# Altium PCB Copy of PCB1.PcbDoc
Units mm, origin at the board's own origin, x right, y up, seen from the top; angles counter-clockwise.
Board outline 88.75 x 93.25 mm, 2 copper layers (Top Layer, Bottom Layer); 31 components, 32 nets, 137 pads, 4 vias.
Unrouted connection lines stored in the file: 64.
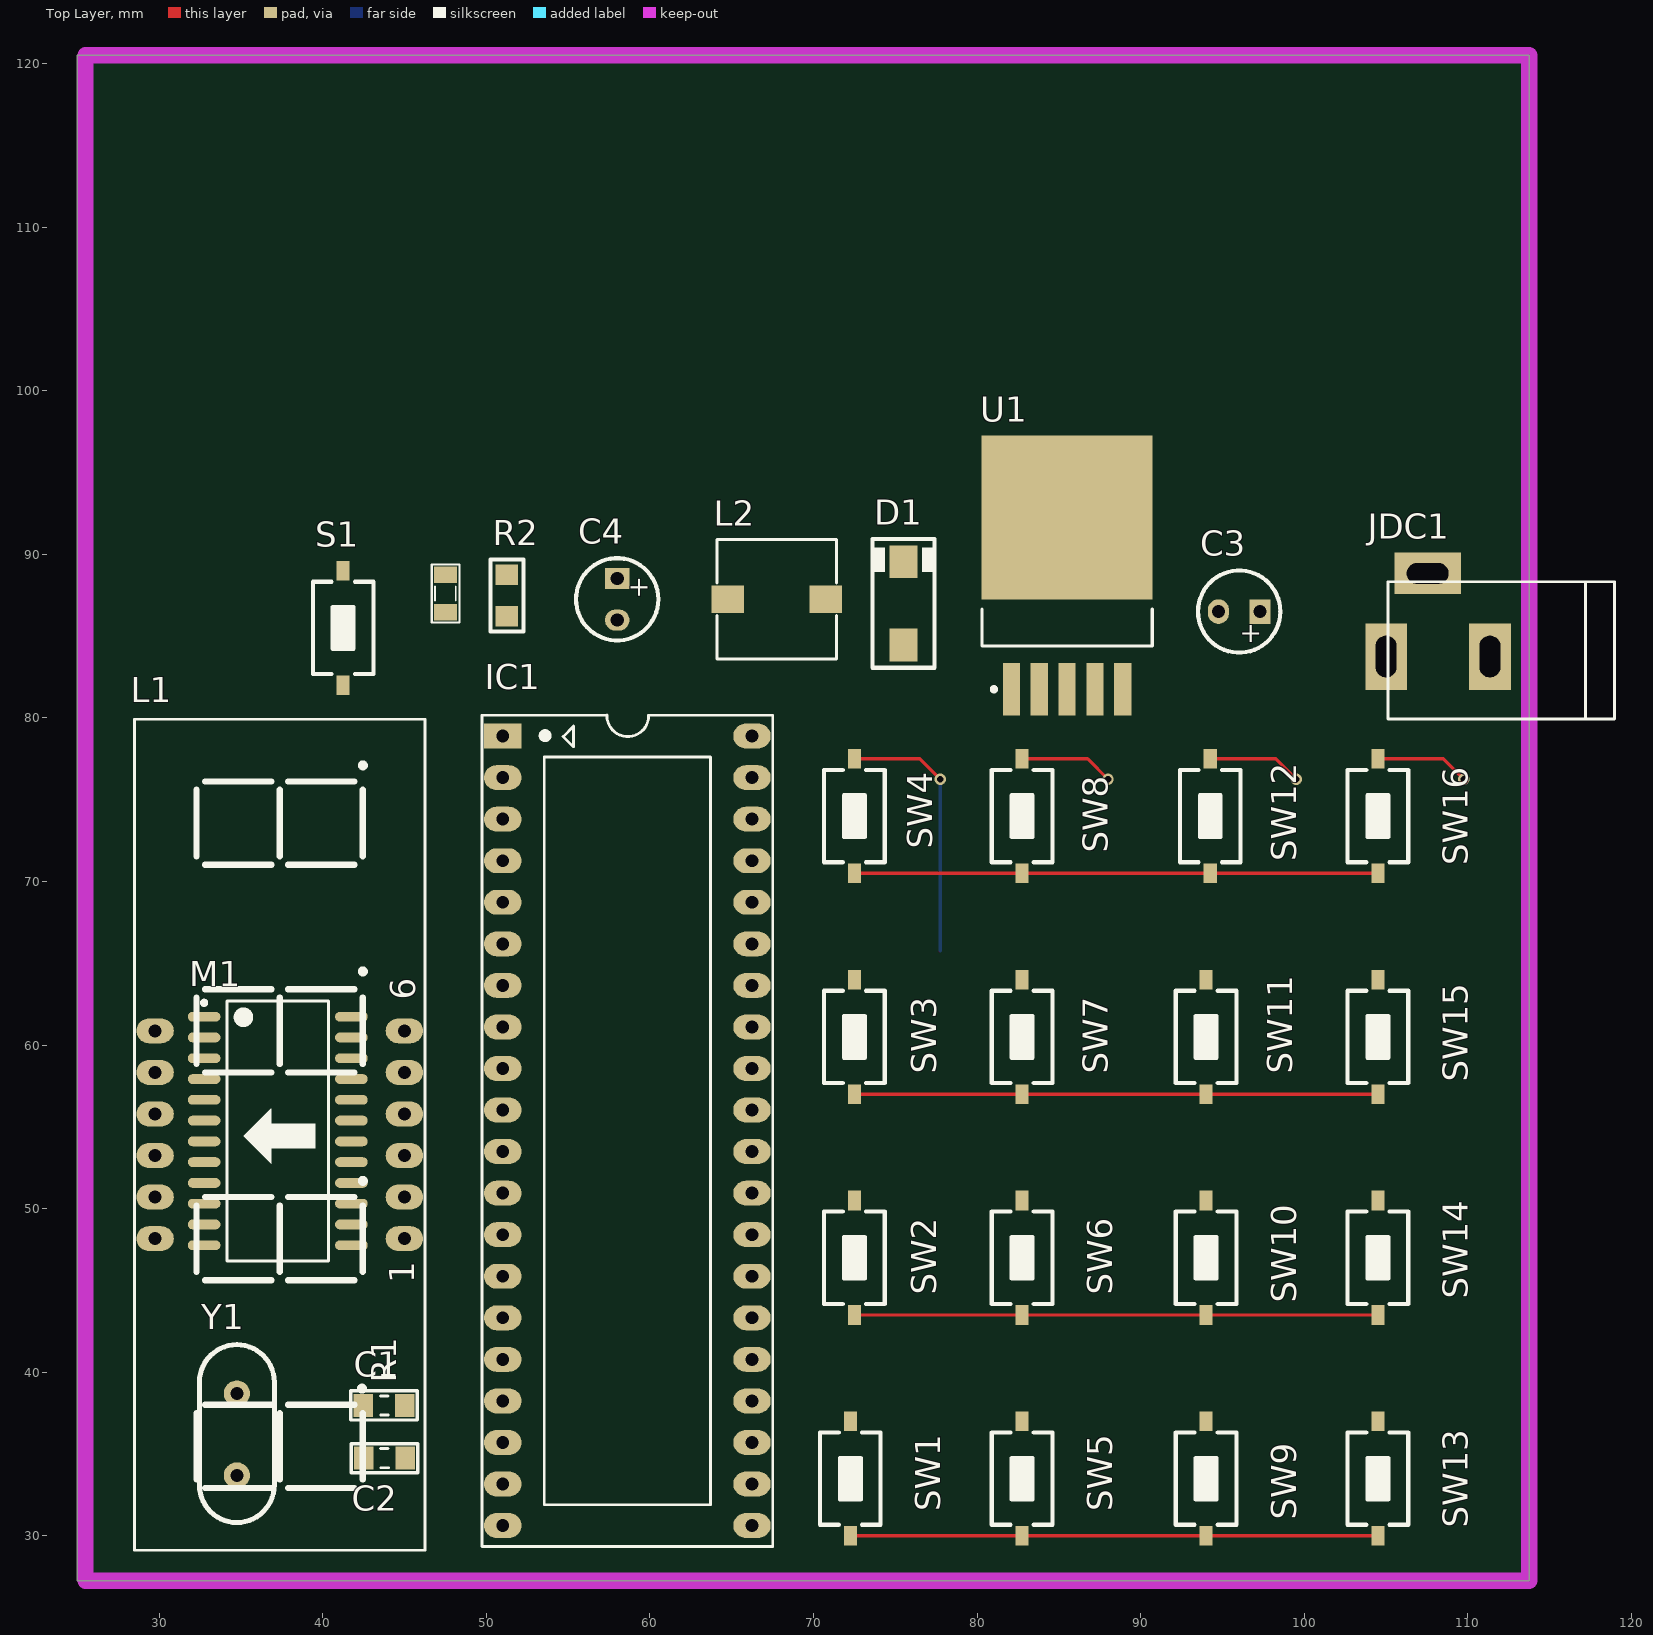
[diagram p0: Top Layer view]
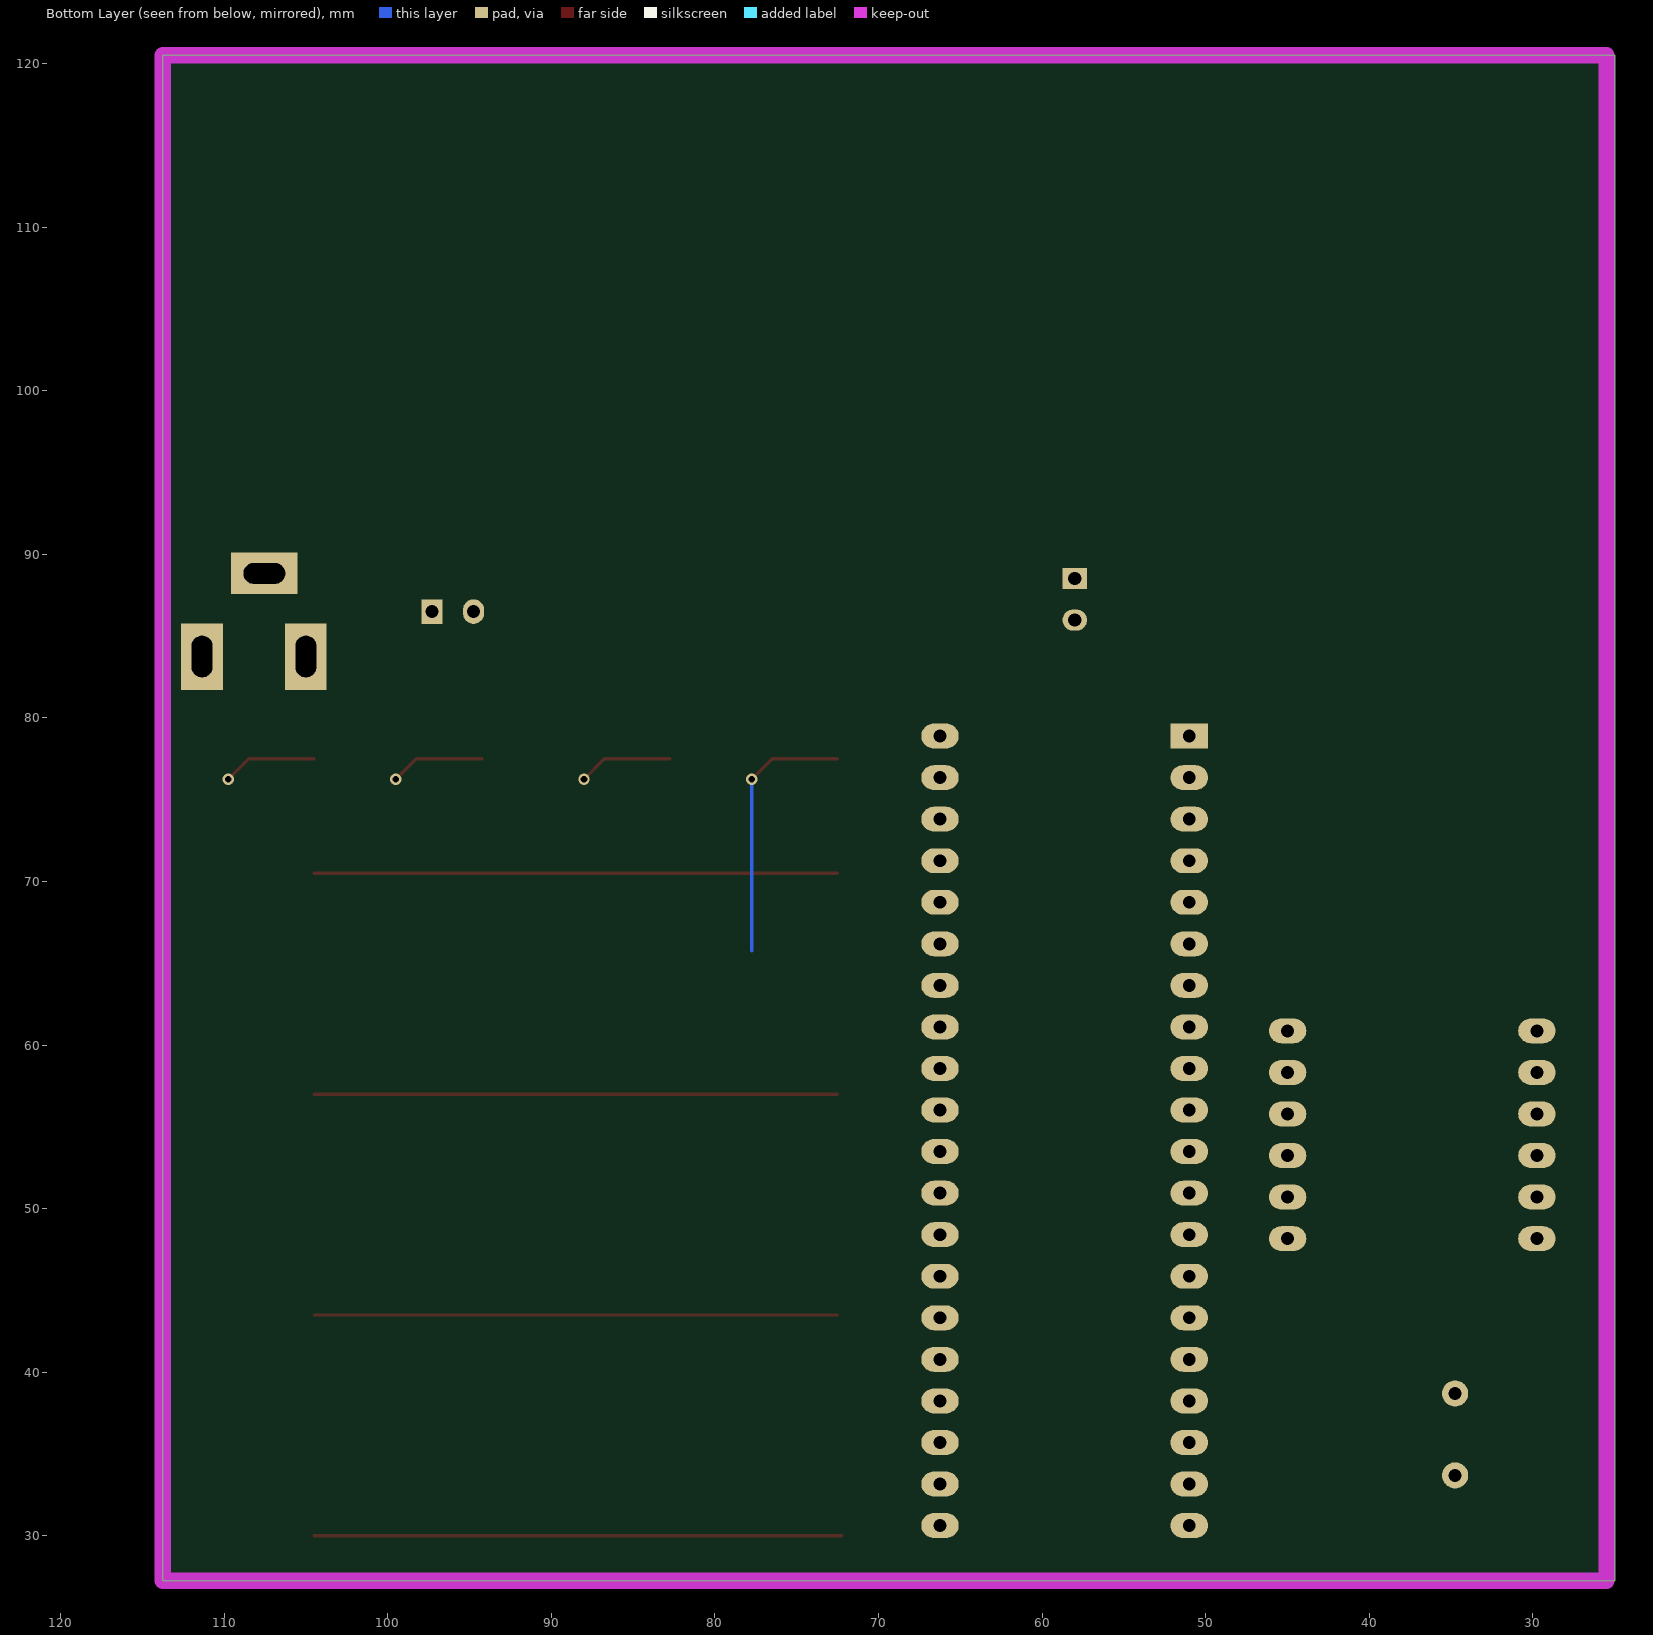
[diagram p1: Bottom Layer view, seen from below]

## Layer stack, top to bottom
Top Solder: solder mask 0.0102, Solder Resist, Dk 3.5
Top Layer: signal copper 0.0356
Dielectric 1: dielectric 0.32, FR-4, Dk 4.8
Bottom Layer: signal copper 0.0356
Bottom Solder: solder mask 0.0102, Solder Resist, Dk 3.5

## Board outline
25,27.25 25,120.5 113.75,120.5 113.75,27.25

## Design rules (kind name [scope] priority, off if disabled: settings)
Clearance [All] p1: gap=0.2 ignorepadtopadclearanceinfootprint=FALSE
PolygonConnect [All] p1: connectstyle=Relief reliefconductorwidth=0.254 reliefentries=4 polygonreliefangle="90 Angle" airgapwidth=0.254
RoutingVias RoutingVias_power [InNetClass('Power_class')] p1: holewidth=0.7 width=1.1 viastyle="Through Hole" minholewidth=0.7 minwidth=1.1 maxholewidth=0.7 maxwidth=1.1
RoutingVias RoutingVias_signal [All] p2: holewidth=0.4 width=0.7 viastyle="Through Hole" minholewidth=0.4 minwidth=0.7 maxholewidth=0.4 maxwidth=0.7
SolderMaskExpansion [All] p1: expansion=0.102
Width Width_power [InNetClass('Power_class')] p1: maxlimit=2 minlimit=0.5 preferedwidth=1
Width Width_signal [All] p2: maxlimit=0.2 minlimit=0.2 preferedwidth=0.2
30 further rules are at their usual default settings.

## Classes and differential pairs
net class Power_class: +5 GND NetC3_1 NetD1_2
component class Designator: SW1 SW2 SW3 SW4 SW5 SW6 SW7 SW8 SW9 SW10 SW11 SW12 SW13 SW14 SW15 SW16
component class [05]-POWER: C3 C4 D1 JDC1 L2 U1
component class [03]-LED7SEG: L1 M1 R2
component class [02]-MCU: C1 C2 IC1 R1 S1 Y1

## Components (designator, comment, footprint, x,y, rotation, side; value= is the part's Value field where it differs from the comment)
C1 "22pF" CAP_0805 43.75,38 r0 top value=33p
C2 "22pF" CAP_0805 43.77,34.775 r0 top value=33p
C3 "470uF" C5mm 96.02,86.5 r180 top
C4 "220uF" C5mm 58,87.25 r270 top
D1 "1N5822" SMA 75.5,87 r90 top value="Diode c?m 1N5408"
IC1 "AT89C52" DIP40/W0.6 51,78.89 r270 top
JDC1 "Jac DC" DC-IN 108.175,86.29 r180 top
L1 "Led 7 Seg 4 digit - Anode" 7SEGQ 44.99,48.17 r90 top
L2 "150mH" L-SMD-M-7.3x4.5 67.75,87.25 r270 top value="150 mH"
M1 "MAX7219ENG" SO24_L 37.25,54.75 r0 top
R1 "1k" RES-SMD-0805 47.5,87.607 r90 top value="R1/4W - 1K"
R2 "10k" RES_SMD_0805 51.25,87.48 r90 top value="R1/4W - 1K"
S1 "SW-SMD" SW-SMD 41.25,85.5 r90 top
SW1 "SW" SW-SMD 72.25,33.5 r90 top value="SW chip 2 pin"
SW2 "SW" SW-SMD 72.5,47 r90 top value="SW chip 2 pin"
SW3 "SW" SW-SMD 72.5,60.5 r90 top value="SW chip 2 pin"
SW4 "SW" SW-SMD 72.5,74 r90 top value="SW chip 2 pin"
SW5 "SW" SW-SMD 82.75,33.5 r90 top value="SW chip 2 pin"
SW6 "SW" SW-SMD 82.75,47 r90 top value="SW chip 2 pin"
SW7 "SW" SW-SMD 82.75,60.5 r90 top value="SW chip 2 pin"
SW8 "SW" SW-SMD 82.75,74 r90 top value="SW chip 2 pin"
SW9 "SW" SW-SMD 94,33.5 r90 top value="SW chip 2 pin"
SW10 "SW" SW-SMD 94,47 r90 top value="SW chip 2 pin"
SW11 "SW" SW-SMD 94,60.5 r90 top value="SW chip 2 pin"
SW12 "SW" SW-SMD 94.25,74 r90 top value="SW chip 2 pin"
SW13 "SW" SW-SMD 104.5,33.5 r90 top value="SW chip 2 pin"
SW14 "SW" SW-SMD 104.5,47 r90 top value="SW chip 2 pin"
SW15 "SW" SW-SMD 104.5,60.5 r90 top value="SW chip 2 pin"
SW16 "SW" SW-SMD 104.5,74 r90 top value="SW chip 2 pin"
U1 "LM2976" TO-263 85.5,87.75 r90 top
Y1 "20MHz" XTAL 34.75,36.25 r90 top

## Footprints (in the part's own frame and the unit in brackets; to place one, negate y for a bottom-side part, rotate by r counter-clockwise, add the part's x,y. Pads: shape width x height; smd on the part's side, far side on the other; paste and mask are expansions set on the pad)
7SEGQ [mil] "DIP 12 Leads; Body 48 x 20 mm; Pitch 0.5 mm"
  oval 60x90 hole 31: 1(0,0) 2(100,0) 3(200,0) 4(300,0) 5(400,0) 6(500,0) 7(500,600) 8(400,600) 9(300,600) 10(200,600) 11(100,600) 12(0,600)
  silkscreen extent -750,-50 1250,650, body extent -720,-80 1260,668, height 565
C5mm [mm]
  rect 1.3x1.5 hole 0.8: 1(-1.27,0)
  oval 1.3x1.5 hole 0.8: 2(1.27,0)
  silkscreen extent -2.51,-2.51 2.51,2.51, body extent -2.5,-2.5 2.49,2.5, height 11.01
CAP_0805 [mm]
  rect 1.2x1.4 smd: 1(-1.27,-0.025) 2(1.27,-0.025)
  silkscreen extent -2.03,-0.91 2.03,0.86, body extent -1.01,-0.66 1.01,0.61, height 0.61
DC-IN [mil] "Jac DC input"
  rect 100x160 hole 50 slot 100 at 90 deg: 1(125,100) 2(-125,100)
  rect 160x100 hole 50 slot 100 at 0 deg: 3(25,-100)
  silkscreen extent -425,-80 120,250, body extent -410,-105 134,269, height 434
DIP40/W0.6 [mil] "40 PIN, W 600mil, Pin to pin 100mil"
  rect 60x90 hole 31: 1(0,0)
  oval 60x90 hole 31: 2(100,0) 3(200,0) 4(300,0) 5(400,0) 6(500,0) 7(600,0) 8(700,0) 9(800,0) 10(900,0) 11(1000,0) 12(1100,0) 13(1200,0) 14(1300,0) 15(1400,0) 16(1500,0) 17(1600,0) 18(1700,0) 19(1800,0) 20(1900,0) 21(1900,600) 22(1800,600) 23(1700,600) 24(1600,600) 25(1500,600) 26(1400,600) 27(1300,600) 28(1200,600) 29(1100,600) 30(1000,600) 31(900,600) 32(800,600) 33(700,600) 34(600,600) 35(500,600) 36(400,600) 37(300,600) 38(200,600) 39(100,600) 40(0,600)
  silkscreen extent -50,-50 1950,650, body extent -82,-10 1982,600, height 224
L-SMD-M-7.3x4.5 [mm] "WE-PDA SMD Shielded Power Inductor, 7345"
  rect 1.7x2 smd: 1(0,3) 2(0,-3)
  silkscreen extent -3.65,-3.65 3.65,3.65, body extent -3.65,-3.65 3.65,3.65, height 4.05
RES-SMD-0805 [mil]
  rect 39.37x55 smd: 1(-45,0) 2(45,0)
  silkscreen extent -70,-34 70,33, body extent -39,-25 39,25, height 31
RES_SMD_0805 [mil]
  rect 50x55 smd: 1(-50,0) 2(50,0)
  silkscreen extent -87,-40 87,39, body extent -45,-27 45,27, height 30
SMA [mm]
  rect 2x1.7 smd: 1(-2.544,0) 2(2.544,0)
  silkscreen extent -3.94,-1.9 3.94,1.91, body extent -2.87,-1.4 2.87,1.4, height 2.29
SO24_L [mm] "SOIC, 24-Leads, Body 15.4x7.5mm, Pitch 1.27mm, IPC High Density"
  oval 2x0.6 smd: 1(-4.5,6.985) 2(-4.5,5.715) 3(-4.5,4.445) 4(-4.5,3.175) 5(-4.5,1.905) 6(-4.5,0.635) 7(-4.5,-0.635) 8(-4.5,-1.905) 9(-4.5,-3.175) 10(-4.5,-4.445) 11(-4.5,-5.715) 12(-4.5,-6.985) 13(4.5,-6.985) 14(4.5,-5.715) 15(4.5,-4.445) 16(4.5,-3.175) 17(4.5,-1.905) 18(4.5,-0.635) 19(4.5,0.635) 20(4.5,1.905) 21(4.5,3.175) 22(4.5,4.445) 23(4.5,5.715) 24(4.5,6.985)
  silkscreen extent -4.62,-7.95 3.1,7.96, body extent -3.8,-7.8 3.8,7.8, height 2.65
SW-SMD [mm] "Switch SMD type"
  rect 1.2x0.8 smd: 1(-3.5,0) 2(3.5,0)
  silkscreen extent -2.82,-1.85 2.82,1.85, body extent -3.05,-1.85 3.05,1.85, height 2.5
TO-263 [mm]
  rect 3.2x1.05 smd: 1(-6,3.4) 2(-6,1.7) 3(-6,0) 4(-6,-1.7) 5(-6,-3.4)
  rect 10x10.45 smd: 6(4.5,0)
  silkscreen extent -6.12,-5.2 -1.1,5.2, body extent -6.58,-5.2 7.57,5.2, height 4.65
XTAL [mm]
  round 1.6 hole 0.8: 1(-2.552,0.001) 2(2.448,0.001)
  silkscreen extent -5.44,-2.29 5.44,2.29, body extent -5.55,-2.32 5.62,2.35, height 3.63

## Part data
C1 C2: library part CapSMD, "Capacitor", LatestRevisionDate=17-Jul-2002, LatestRevisionNote="Re-released for DXP Platform.", PackageReference=RAD-0.3, Published=8-Jun-2000, Publisher="Altium Limited"
C3 C4: library part "Cap Pol", "Polarized Capacitor (Axial)", LatestRevisionDate=17-Jul-2002, LatestRevisionNote="Re-released for DXP Platform.", PackageReference=POLAR0.8, Published=8-Jun-2000, Publisher="Altium Limited"
D1: "Schottky Rectifiers"
IC1: "Atmel AT89C52, 8k Byte Flash Memory , 40 Pin"
JDC1: library part DCIN, "Jac DC input"
L1: library part LED7SEG-4DIGIT-A
L2: library part Inductor, "Inductor"
M1: "Serially Interfaced, 8-Digit LED Display Driver", Code_JEDEC=MS-001-AF, ComponentLink1Description="Manufacturer Link", ComponentLink1URL=http://www.maxim-ic.com/, ComponentLink2Description=Datasheet, ComponentLink2URL=http://pdfserv.maxim-ic.com/en/ds/MAX7219-MAX7221.pdf, DatasheetVersion=Jul-1997, LatestRevisionDate=29-May-2009, LatestRevisionNote="Component Body Added.", PackageDescription="DIP, 24-Pin, Row Spacing 7.62 mm, Pitch 2.54 mm", PackageReference=NG24A, PackageVersion=1997, Published=16-Jan-2001, Publisher="Altium Limited"
R1 R2: library part "Resistor - DIP", "Resistor - DIP"
S1: "Switch", LatestRevisionDate=17-Jul-2002, LatestRevisionNote="Re-released for DXP Platform.", PackageReference=SPST-2, Published=24-Mar-1999, Publisher="Altium Limited"
SW1 SW2 SW3 SW4 SW5 SW6 SW7 SW8 SW9 SW10 SW11 SW12 SW13 SW14 SW15 SW16: library part SW2, "Switch button 2 pin"
U1: library part LM2596, Max Input Voltage="12 V", Max Output Current="3 (6.0 peak) A", Max Output Voltage=mV, Temperature Range="-40 to +125 degC", Category=IC-Power, Min Input Voltage=mV, Min Output Voltage=mV, Mounting Technology="Surface Mount", Status=Unreleased, Supply Voltage=mV
Y1: library part XTAL, "Crystal Oscillator", LatestRevisionDate=17-Jul-2002, LatestRevisionNote="Re-released for DXP Platform.", PackageReference=R38, Published=8-Jun-2000, Publisher="Altium Limited"

## Via types
v1: diameter 0.7, hole 0.4, Top Layer to Bottom Layer, 4 vias

## Nets (pads, with @x,y where several pads share a name; then routed paths per layer and width w, separated by ;. In a path a pad name is that pad's centre, name@x,y a point inside that pad or via, vN(x,y) a via of type N, cw(c..) or ccw(c..) an arc to the next point about the centre after c; other vN are vias at no path point)
+5: C4.1 IC1.31 IC1.40 L1.7 L2.2 M1.19 R2.2 S1.1 U1.4
D0: M1.2
D1: L1.11 M1.11
D2: L1.10 M1.6
D3: L1.6 M1.7
GND: C1.1 C2.1 C3.2 C4.2 D1.1 JDC1.2 JDC1.3 L1.8 M1.4 M1.9 R1.1 U1.3 U1.5
NetC1_2: C1.2 IC1.18 Y1.2
NetC2_2: C2.2 IC1.19 Y1.1
NetC3_1: C3.1 JDC1.1 U1.1
NetD1_2: D1.2 L2.1 U1.2
NetIC1_1: IC1.1 SW1.1 SW5.1 SW9.1 SW13.1 | length 32.2
  Top Layer w0.2: SW1.1 SW5.1 SW9.1 SW13.1
NetIC1_2: IC1.2 SW2.1 SW6.1 SW10.1 SW14.1 | length 32
  Top Layer w0.2: SW2.1 SW6.1 SW10.1 SW14.1
NetIC1_3: IC1.3 SW3.1 SW7.1 SW11.1 SW15.1 | length 32
  Top Layer w0.2: SW3.1 SW7.1 SW11.1 SW15.1
NetIC1_4: IC1.4 SW4.1 SW8.1 SW12.1 SW16.1 | length 32
  Top Layer w0.2: SW4.1 SW8.1 SW12.1 SW16.1
NetIC1_5: IC1.5 SW1.2 SW2.2 SW3.2 SW4.2 | length 16.3
  Top Layer w0.2: SW4.2 76.5,77.5 v1(77.75,76.25)
  Bottom Layer w0.2: 77.75,65.75 v1(77.75,76.25)
NetIC1_6: IC1.6 SW5.2 SW6.2 SW7.2 SW8.2 | length 5.8
  Top Layer w0.2: SW8.2 86.75,77.5 v1(88,76.25)
NetIC1_7: IC1.7 SW9.2 SW10.2 SW11.2 SW12.2 | length 5.8
  Top Layer w0.2: SW12.2 98.25,77.5 v1(99.5,76.25)
NetIC1_8: IC1.8 SW13.2 SW14.2 SW15.2 SW16.2 | length 5.8
  Top Layer w0.2: SW16.2 108.5,77.5 v1(109.75,76.25)
NetIC1_9: IC1.9 R1.2 S1.2
NetIC1_21: IC1.21 M1.13
NetIC1_22: IC1.22 M1.12
NetIC1_23: IC1.23 M1.1
NetL1_1: L1.1 M1.21
NetL1_2: L1.2 M1.23
NetL1_3: L1.3 M1.22
NetL1_4: L1.4 M1.20
NetL1_5: L1.5 M1.17
NetL1_9: L1.9 M1.16
NetL1_12: L1.12 M1.15
NetL1_13: M1.14
NetM1_18: M1.18 R2.1
"": 
pads on no net: IC1.10 IC1.11 IC1.12 IC1.13 IC1.14 IC1.15 IC1.16 IC1.17 IC1.20 IC1.24 IC1.25 IC1.26 IC1.27 IC1.28 IC1.29 IC1.30 IC1.32 IC1.33 IC1.34 IC1.35 IC1.36 IC1.37 IC1.38 IC1.39 M1.3 M1.5 M1.8 M1.10 M1.24 U1.6

## Keep-outs
Keep-Out Layer:
  lines w1: 25.5,27.25 113.75,27.25 113.75,120.5 25.5,120.5 25.5,27.25

## Text inside footprints (layer, text, board x,y; h text height)
C3: Top Overlay "+" at 97.417,85.662 h1.2 r180
C4: Top Overlay "+" at 58.838,88.647 h1.2 r270
L1: Top Overlay "6" at 45.65,62.775 h1.52 r90; Top Overlay "1" at 45.6,45.427 h1.52 r90